# Altium PCB bh_carrier_0_beta.PcbDoc (part 1 of 2)
Units mm, origin at the board's own origin, x right, y up, seen from the top; angles counter-clockwise.
Board outline 100 x 60 mm, 2 copper layers (Top Layer, Bottom Layer); 128 components, 129 nets, 524 pads, 190 vias.
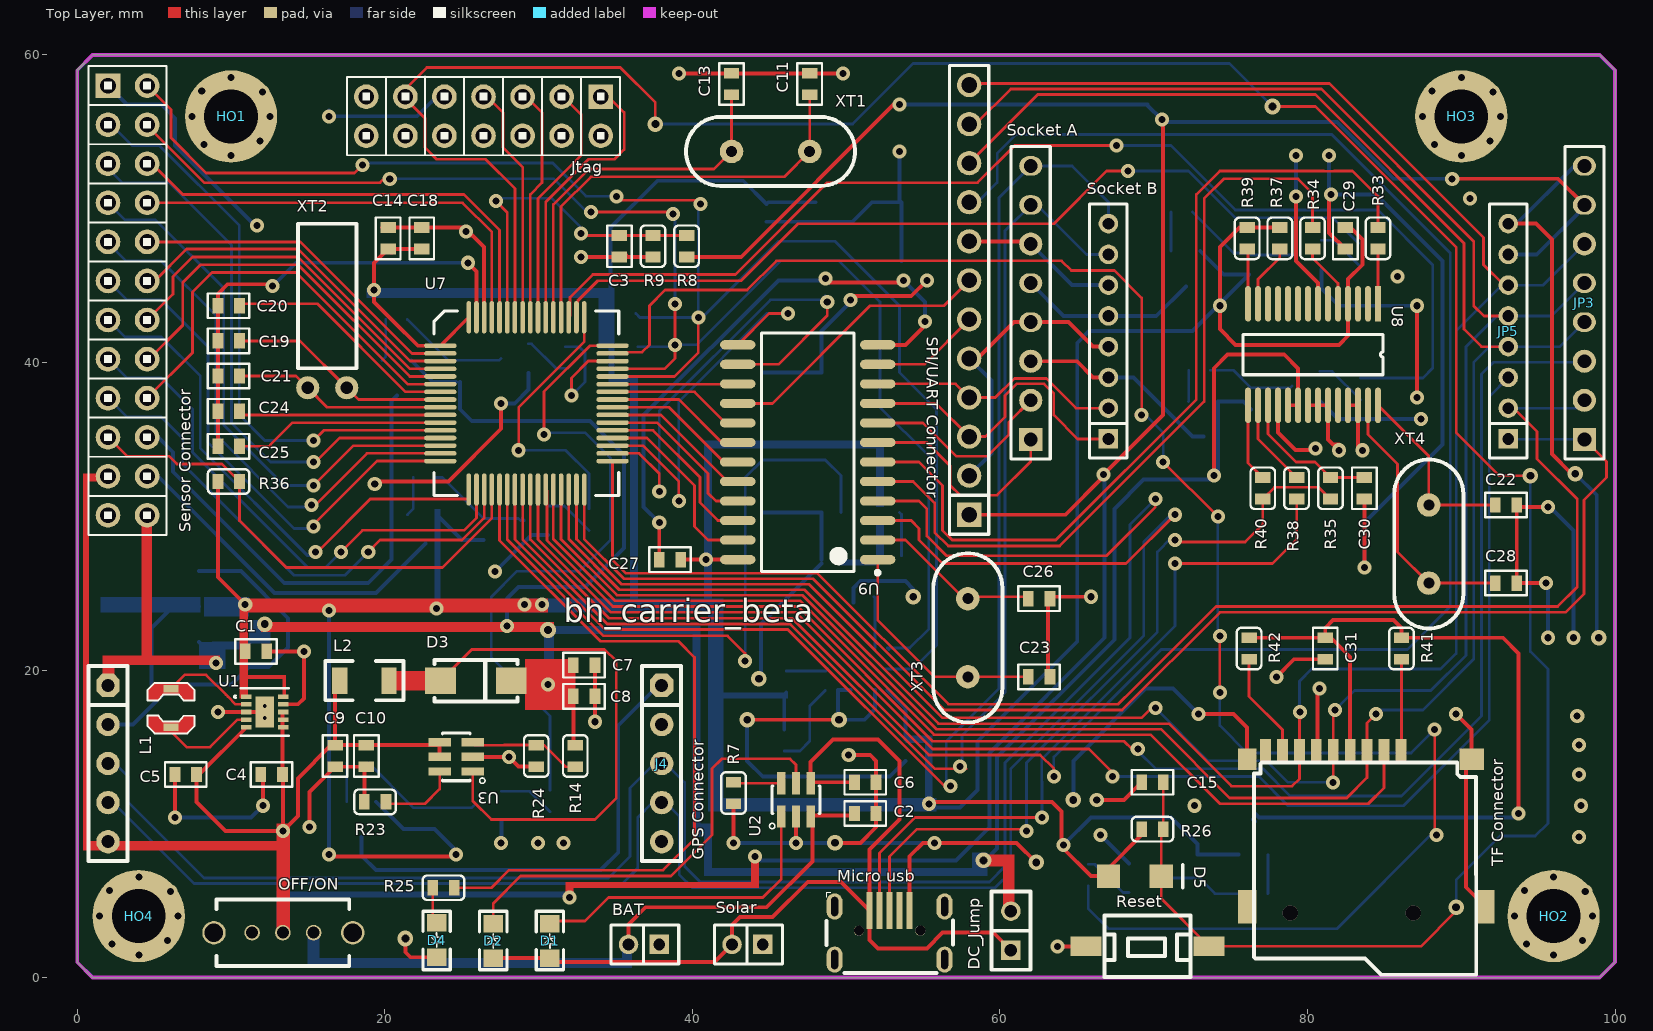
[diagram p0: Top Layer view]
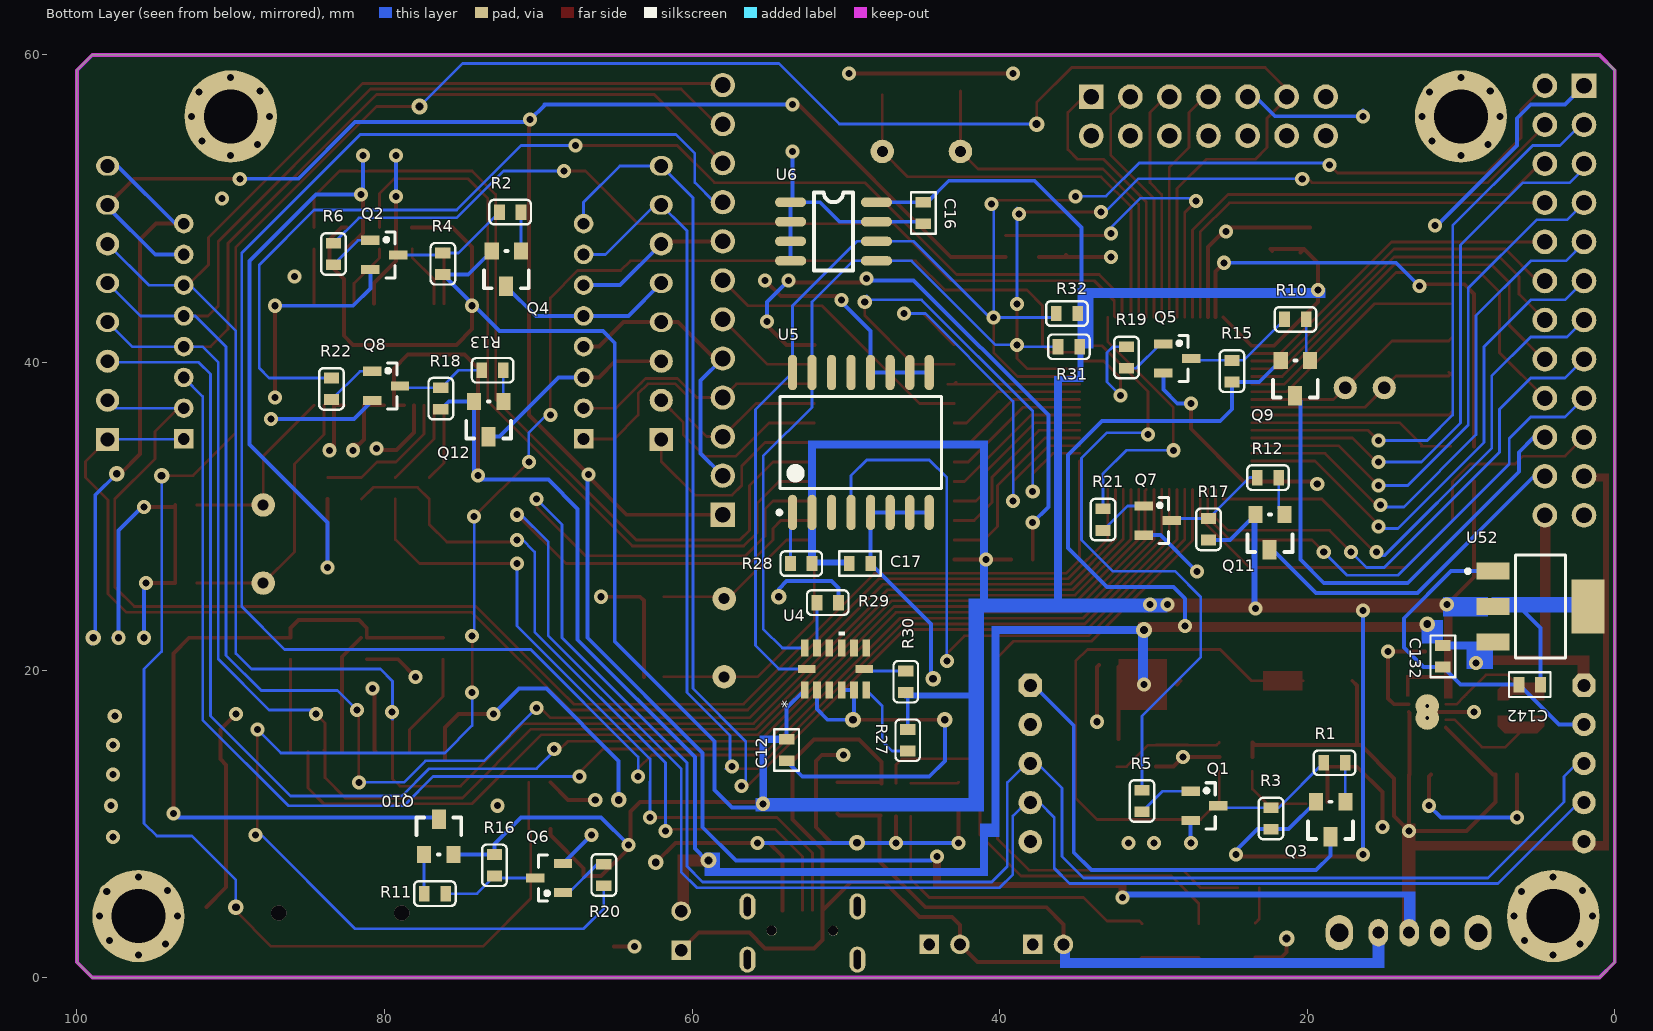
[diagram p1: Bottom Layer view, seen from below]

## Layer stack, top to bottom
Top Layer: signal copper 0.0356
Dielectric: dielectric 0.32, FR-4, Dk 4.8
Bottom Layer: signal copper 0.0356

## Board outline
0,59 1,60 99,60 100,59 100,1 99,0 1,0 0,1

## Design rules (kind name [scope] priority, off if disabled: settings)
Clearance Clearance_1 [(InPolygon)] p1: gap=0.508
Clearance [All] p2: gap=0.178
HoleSize [All] p1: absolutevalues=TRUE maxlimit=25.4 minlimit=0.025 maxpercent=80.000 minpercent=20.000
MinimumSolderMaskSliver [All] p1 off: minsoldermaskwidth=0.254
PolygonConnect [All] p1: connectstyle=Relief reliefconductorwidth=0.254 reliefentries=4 polygonreliefangle="90 Angle"
RoutingVias [All] p1: holewidth=0.508 width=1.016 viastyle="Through Hole" minholewidth=0.381 minwidth=0.762 maxholewidth=0.508 maxwidth=1.016
ShortCircuit ShortCircuit_1 [HasFootPrint('HOLE1') OR  HasFootPrint('QFN-10') OR HasFootPrint('LPS3010')] p1: allowed=TRUE
ShortCircuit [All] p2: allowed=FALSE
SilkToSilkClearance [All] p1: silktosilkclearance=0.178
SilkscreenOverComponentPads [All] p1 off: minsilkscreentomaskgap=0.254
SolderMaskExpansion [All] p1: expansion=0.102
Width Width_2 [(OnLayer('Keep-Out Layer'))] p1: maxlimit=0.254 minlimit=0.254 preferedwidth=0.254
Width Width_1 [(InNet('VBUS') OR InNet('VCC_BASE_3.3V') OR InNet('VCC_BASE_5V') OR InNet('VCC_GPS_3.3V') OR InNet('VCC_SD_3.3V') OR InNet('VCC_SENSOR_3.3V') OR InNet('VCC_SENSOR_5V') OR InNet('VCC_SOCKET_3.3V') OR InNet('VCC_SOCKET_5V') OR InNet('VIN') OR InNet('V_BAT') OR InNet('GND') OR InNet('BAT'))] p2: maxlimit=0.254 minlimit=0.254 preferedwidth=0.254
Width [All] p3: maxlimit=0.178 minlimit=0.178 preferedwidth=0.178 minimp=50.000000 maximp=50.000000 favimp=50.000000
23 further rules are at their usual default settings.

## Components (designator, comment, footprint, x,y, rotation, side; value= is the part's Value field where it differs from the comment)
BAT "Battery Connector" SIP1X2X2.0 37.846,2.159 r180 top (schematic designator J1)
C1 "10uf/6.3V" C0603 10.922,21.209 r0 top
C2 "10uF" C0603 51.943,10.668 r180 top
C3 "0.1uf" C0603 35.253,48.26 r270 top
C4 "0.1uf" C0603 11.938,13.208 r0 top
C5 "4.7uf/6.3V" C0603 6.35,13.208 r0 top
C6 "1uF" C0603 51.943,12.7 r180 top
C7 "22uF/16V" C0603 32.258,20.32 r0 top
C8 "0.1uF" C0603 32.258,18.288 r0 top
C9 "0.1uF" C0603 16.764,15.113 r270 top
C10 "10uF/6.3V" C0603 18.796,15.113 r270 top
C11 "22pf" C0603 47.625,58.801 r270 top
C12 "0.1uF" C0603 53.848,15.494 r270 bottom
C13 "22pf" C0603 42.545,58.801 r270 top
C14 "0.1uf" C0603 20.214,47.371 r90 top
C15 "0.1uf" C0603 70.612,12.7 r180 top
C16 "0.1uF" C0603 44.958,50.419 r270 bottom
C17 "0.1uF" C0603 49.784,26.924 r180 bottom
C18 "0.1uf" C0603 22.4,47.371 r90 top
C19 "22pf" C0603 9.144,41.402 r0 top
C20 "0.1uf" C0603 9.144,43.688 r0 top
C21 "22pf" C0603 9.144,39.116 r0 top
C22 "22pf" C0603 92.202,30.734 r0 top
C23 "22pf" C0603 61.846,19.558 r0 top
C24 "0.1uf" C0603 10.544,36.83 r180 top
C25 "0.1uf" C0603 10.544,34.544 r180 top
C26 "22pf" C0603 63.246,24.638 r180 top
C27 "0.1uF" C0603 37.846,27.178 r0 top
C28 "22pf" C0603 92.202,25.654 r0 top
C29 "0.1uf" C0603 82.455,48.771 r270 top
C30 "0.1u" C0603 83.693,31.115 r90 top
C31 "0.1uf" C0603 81.153,20.698 r90 top
C132 "" C0603 11.176,21.59 r270 bottom
C142 "" C0603 4.826,19.05 r0 bottom
D1 "LED-RED" D0805 30.734,1.27 r90 top
D2 "LED-GREEN" D0805 27.051,1.27 r90 top
D3 "SM340A" DO-214 23.622,19.304 r0 top
D4 "LED-GREEN" D0805 23.368,3.556 r270 top
D5 "IN4148" D1206 67.056,6.604 r0 top
DC_Jump "JUMPER0" SIP1X2X2.54 60.706,1.778 r90 top (schematic designator JP16)
"GPS Connector" "GPS_Socket-B" SIP1X5X2.54 2,19 r270 top locked (schematic designator J5)
HO1 "HOL" HOLE1 10,56 r0 top locked
HO2 "HOL" HOLE1 96,4 r0 top locked
HO3 "HOL" HOLE1 90,56 r0 top locked
HO4 "HOL" HOLE1 4,4 r0 top locked
J4 "GPS_Socket-A" SIP1X5X2.54 38,19 r270 top locked
JP3 "Socket0-B" SIP1x8x2.54 98,35 r90 top locked
JP5 "Socket1B" SIP1x8x2.0 93,35 r90 top locked
Jtag "JTAG" SIP2X7X2.54 34.036,57.285 r180 top (schematic designator P2)
L1 "1.5uH" LPS3010 6.096,17.526 r270 top
L2 "3.3uH" L1206 18.669,19.304 r0 top
"Micro usb" "USB" MicroUSB_four 50.546,4.572 r0 top (schematic designator P1)
OFF/ON "SD12D07VG3" SW-1-2 15.367,2.921 r270 top (schematic designator S1)
Q1 "9013" SOT-23 26.676,11.17 r180 bottom
Q2 "9013" SOT-23 80.01,46.99 r180 bottom
Q3 "RTR020P02" TSMT3 17.526,11.43 r0 bottom
Q4 "RTR020P02" TSMT3 71.126,47.238 r0 bottom
Q5 "9013" SOT-23 28.448,40.259 r180 bottom
Q6 "9013" SOT-23 69.291,6.477 r0 bottom
Q7 "9013" SOT-23 29.718,29.718 r180 bottom
Q8 "9013" SOT-23 79.889,38.475 r180 bottom
Q9 "RTR020P02" TSMT3 19.818,40.126 r0 bottom
Q10 "RTR020P02" TSMT3 77.419,8.001 r180 bottom
Q11 "RTR020P02" TSMT3 21.474,30.099 r0 bottom
Q12 "RTR020P02" TSMT3 72.269,37.459 r0 bottom
R1 "10k" R0603 17.526,13.97 r0 bottom
R2 "10k" R0603 71.126,49.778 r0 bottom
R3 "100k" R0603 22.352,9.652 r90 bottom
R4 "100k" R0603 76.2,45.72 r90 bottom
R5 "1k" R0603 30.74,12.186 r270 bottom
R6 "1k" R0603 83.312,47.752 r270 bottom
R7 "1.66k 1%" R0603 42.672,11.303 r90 top
R8 "1M  1%" R0603 39.624,48.26 r270 top
R9 "1M 1%" R0603 37.439,48.26 r270 top
R10 "10k" R0603 20.066,42.799 r0 bottom
R11 "10k" R0603 77.419,5.461 r180 bottom
R12 "10k" R0603 21.844,32.512 r0 bottom
R13 "10k" R0603 72.269,39.491 r0 bottom
R14 "110k" R0603 32.385,13.716 r90 top
R15 "100k" R0603 24.892,38.735 r90 bottom
R16 "100k" R0603 72.847,8.001 r270 bottom
R17 "100k" R0603 26.416,28.448 r90 bottom
R18 "100k" R0603 76.333,36.951 r90 bottom
R19 "1k" R0603 31.75,41.021 r270 bottom
R20 "1k" R0603 65.735,5.969 r90 bottom
R21 "1k" R0603 33.274,30.48 r270 bottom
R22 "1k" R0603 83.445,38.983 r270 bottom
R23 "18k" R0603 18.669,11.43 r0 top
R24 "15k" R0603 29.845,13.716 r90 top
R25 "1k" R0603 23.114,5.842 r0 top
R26 "4.7k" R0603 70.612,9.652 r180 top
R27 "0" R0603 45.974,16.129 r270 bottom
R28 "10k" R0603 53.594,26.924 r180 bottom
R29 "0" R0603 51.873,24.384 r180 bottom
R30 "10k" R0603 46.101,18.542 r90 bottom
R31 "10k" R0603 36.195,41.021 r180 bottom
R32 "10k" R0603 36.322,43.18 r180 bottom
R33 "100" R0603 84.582,47.371 r90 top
R34 "100" R0603 80.328,47.371 r90 top
R35 "2k" R0603 81.492,31.115 r90 top
R36 "4.7K" R0603 9.144,32.258 r0 top
R37 "10k" R0603 78.2,47.371 r90 top
R38 "51" R0603 79.29,31.115 r90 top
R39 "10k" R0603 76.073,47.371 r90 top
R40 "51" R0603 77.089,31.115 r90 top
R41 "10k" R0603 86.106,22.098 r270 top
R42 "10k" R0603 76.2,22.098 r270 top
Reset "KEY" KEY_2Pin 69.596,2.032 r0 top (schematic designator K1)
"Sensor Connector" "Sensor Connector" SIP2X12X2.54 2,58 r270 top locked (schematic designator JP1)
"Socket A" "Socket0-A" SIP1x8x2.54 62,35 r90 top locked (schematic designator JP2)
"Socket B" "Socket1-A" SIP1x8x2.0 67,35 r90 top locked (schematic designator JP4)
Solar "Solar Connetcor" SIP1X2X2.0 44.577,2.159 r180 top (schematic designator J2)
"SPI/UART Connector" "SPI/UART Connector" SIP1x12x2.54 58,30.098 r90 top locked (schematic designator JP6)
"TF Connector" "microSD" TF_CARD 83.82,9.652 r270 top (schematic designator SD1)
U1 "TPS63031" QFN-10 12.192,17.272 r0 top
U2 "TP4057" SOT23-6 46.736,11.557 r180 top
U3 "FP6291" SOT23-6 24.638,14.351 r270 top
U4 "ADXL345" LGA-CC-14-1 50.673,20.066 r90 bottom
U5 "DS3231S" SOP16 49.022,34.798 r90 bottom
U6 "AT24C16" SO-8 53.594,50.419 r180 bottom
U7 "MSP430F149" LQFP64_M 29.21,37.338 r0 top
U8 "PL2303" SOP28 85.852,59.69 r270 top
U9 "GM8125-SSO" SOP-24 47.498,34.163 r180 top
U52 "LM1117-3.3V" SOT-223 4.826,24.13 r270 bottom
XT1 "8M" HC-49S 47.625,53.721 r180 top
XT2 "32.768K" AT308 14.986,38.354 r270 top
XT3 "12M" HC-49S 57.912,24.638 r270 top
XT4 "12MHz" HC-49S 87.884,25.654 r90 top

## Footprints (in the part's own frame and the unit in brackets; to place one, negate y for a bottom-side part, rotate by r counter-clockwise, add the part's x,y. Pads: shape width x height; smd on the part's side, far side on the other; paste and mask are expansions set on the pad)
AT308 [mm] "XT32748"
  round 1.5 hole 0.8: 1(0,0) 2(0,2.54)
  silkscreen extent -10.67,-0.64 -1.27,3.17, body extent -10.19,-0.55 0.59,2.9, height 3.12
C0603 [mm]
  rect 0.7x1 smd: 1(0,0) 2(1.4,0)
  silkscreen extent -0.65,-0.8 2.05,0.8, body extent -0.09,-0.38 1.51,0.42, height 0.3
D0805 [mil]
  rect 45x50 smd: A(0,0) K(88,0)
  silkscreen extent -30,-35 120,35, body extent 7,-20 88,16, height 33
D1206 [mil]
  rect 60x60 smd: 1(135,0) 2(0,0)
  silkscreen extent 190,-30 190,30
DO-214 [mm]
  rect 2x1.75 smd: 1(0,0) 2(4.6,0)
  silkscreen extent -0.4,-1.35 5,1.35, body extent -0.2,-1.34 4.91,1.33, height 2.12
HC-49S [mil]
  round 60 hole 28: 1(0,0) 2(200,0)
  silkscreen extent -116,-88 316,89, body extent -123,-92 329,92, height 138
HOLE1 [mm]
  round 6 hole 3.5: 0(0,0)
KEY_2Pin [mm]
  rect 2.032x1.27 smd: 1(-4,0) 2(4,0)
  silkscreen extent -2.8,-2 2.8,2
L1206 [mm] "Chip Resistor, 2-Leads, Body 3.2x1.6mm, IPC Medium Density"
  rect 1x1.75 smd: 1(-1.6,0) 2(1.6,0)
  silkscreen extent -2.54,-1.27 2.54,1.27, body extent -1.65,-0.8 1.65,0.8, height 0.6
LGA-CC-14-1 [mm]
  rect 1.118x0.5 smd mask+0.025: 1(-1.371,2) 2(-1.371,1.2) 3(-1.371,0.4) 4(-1.371,-0.4) 5(-1.371,-1.2) 6(-1.371,-2) 8(1.371,-2) 9(1.371,-1.2) 10(1.371,-0.4) 11(1.371,0.4) 12(1.371,1.2) 13(1.371,2)
  rect 0.5x1.118 smd mask+0.025: 7(0,-1.871) 14(0,1.871)
  silkscreen extent 2.18,-0.59 2.44,-0.21
LPS3010 [mm]
  rect 0.5x1 smd mask+0: 1(-1.255,0.002) 2(1.255,-0.002)
  Top Layer region: -1.179,1.526 -0.493,1.526 -0.493,0.84 -0.874,0.535 -0.874,-0.531 -0.493,-0.836 -0.493,-1.522 -1.179,-1.522 -1.636,-1.065 -1.636,1.069
  Top Layer region: 1.179,-1.526 0.493,-1.526 0.493,-0.84 0.874,-0.535 0.874,0.531 0.493,0.836 0.493,1.522 1.179,1.522 1.636,1.065 1.636,-1.069
  silkscreen extent -1.64,-1.53 1.64,1.53, body extent -1.59,-1.61 1.56,1.55, height 1
LQFP64_M [mm] "作者：王千会"
  oval 2.1x0.3 smd: 1(-5.6,3.75) 2(-5.6,3.25) 3(-5.6,2.75) 4(-5.6,2.25) 5(-5.6,1.75) 6(-5.6,1.25) 7(-5.6,0.75) 8(-5.6,0.25) 9(-5.6,-0.25) 10(-5.6,-0.75) 11(-5.6,-1.25) 12(-5.6,-1.75) 13(-5.6,-2.25) 14(-5.6,-2.75) 15(-5.6,-3.25) 16(-5.6,-3.75) 33(5.6,-3.75) 34(5.6,-3.25) 35(5.6,-2.75) 36(5.6,-2.25) 37(5.6,-1.75) 38(5.6,-1.25) 39(5.6,-0.75) 40(5.6,-0.25) 41(5.6,0.25) 42(5.6,0.75) 43(5.6,1.25) 44(5.6,1.75) 45(5.6,2.25) 46(5.6,2.75) 47(5.6,3.25) 48(5.6,3.75)
  oval 0.3x2.1 smd: 17(-3.75,-5.6) 18(-3.25,-5.6) 19(-2.75,-5.6) 20(-2.25,-5.6) 21(-1.75,-5.6) 22(-1.25,-5.6) 23(-0.75,-5.6) 24(-0.25,-5.6) 25(0.25,-5.6) 26(0.75,-5.6) 27(1.25,-5.6) 28(1.75,-5.6) 29(2.25,-5.6) 30(2.75,-5.6) 31(3.25,-5.6) 32(3.75,-5.6) 49(3.75,5.6) 50(3.25,5.6) 51(2.75,5.6) 52(2.25,5.6) 53(1.75,5.6) 54(1.25,5.6) 55(0.75,5.6) 56(0.25,5.6) 57(-0.25,5.6) 58(-0.75,5.6) 59(-1.25,5.6) 60(-1.75,5.6) 61(-2.25,5.6) 62(-2.75,5.6) 63(-3.25,5.6) 64(-3.75,5.6)
  silkscreen extent -6,-6 6,6, body extent -6.07,-6.07 6.07,6.07, height 1.63
MicroUSB_four [mm]
  rect 0.4x2.4 smd: 1(0.976,-0.2) 2(1.626,-0.2) 3(2.276,-0.2) 4(3.576,-0.2) NC(2.926,-0.2)
  oval 1.05x1.7 hole 0.45 slot 1.25 at 90 deg: ""(-1.299,-3.4) ""(-1.299,0.05) ""(5.851,-3.4) ""(5.851,0.05)
  round 0.65 hole 0.65: ""(0.276,-1.525) ""(4.276,-1.525)
  silkscreen extent -1.82,-4.28 6.4,0.99, body extent -1.82,-4.94 6.38,0.99, height 2.69
QFN-10 [mm] "DSK10_2X1P2T"
  rect 0.704x0.3 smd paste-0.15: 1(-1.202,1) 2(-1.202,0.5) 3(-1.202,0) 4(-1.202,-0.5) 5(-1.202,-1) 6(1.202,-1) 7(1.202,-0.5) 8(1.202,0) 9(1.202,0.5) 10(1.202,1)
  rect 1.2x2 smd paste-0.987 mask-0.987: 11(0,0)
  round 0.508 / inner round 1.524 / far side round 1.524 hole 0.254: V(0,-0.394) V_2(0,0.394)
  Top Layer region: 0,1 0,1 0,1 0,1 0,1 0,1 0,1 0,1
  Top Layer region: 0,-1 0,-1 0,-1 0,-1 0,-1 0,-1 0,-1 0,-1
  silkscreen extent -1.98,-1.55 1.55,1.55
R0603 [mm]
  rect 0.7x1 smd: 1(0,0) 2(1.4,0)
  silkscreen extent -0.65,-0.8 2.05,0.8, body extent -0.1,-0.4 1.5,0.4, height 0.3
SIP1X2X2.0 [mil]
  rect 50x50 hole 30: 1(0,0)
  round 50 hole 30: 2(78.74,0)
  silkscreen extent -50,-50 124,50
SIP1X2X2.54 [mil]
  rect 50x50 hole 32: 1(0,0)
  round 50 hole 32: 2(100,0)
  silkscreen extent -50,-50 150,50, body extent -52,-52 148,48, height 340
SIP1X5X2.54 [mil]
  oct 60x60 hole 33: 1(0,0)
  round 60 hole 33: 2(100,0) 3(200,0) 4(300,0) 5(400,0)
  silkscreen extent -50,-50 450,50
SIP1x8x2.0 [mil]
  rect 50x50 hole 30: 1(1,-2)
  round 50 hole 30: 2(79.74,-2) 3(158.48,-2) 4(237.22,-2) 5(315.96,-2) 6(394.7,-2) 7(473.44,-2) 8(552.18,-2)
  silkscreen extent -48,-50 602,46
SIP1x8x2.54 [mm] "Connector; Header; 8 Position"
  rect 1.5x1.5 hole 0.9: 1(0,0)
  round 1.5 hole 0.9: 2(2.54,0) 3(5.08,0) 6(12.7,0)
  oval 1.27x1.5 hole 0.9: 4(7.62,0) 5(10.16,0) 7(15.24,0) 8(17.78,0)
  silkscreen extent -1.27,-1.27 19.05,1.27, body extent -1.27,-1.27 19.05,1.27, height 0.7
SIP1x12x2.54 [mil]
  rect 62x62 hole 40: 1(0,0)
  round 62 hole 40: 2(100,0) 3(200,0) 4(300,0) 5(400,0) 6(500,0) 7(600,0) 8(700,0) 9(800,0) 10(900,0) 11(1000,0) 12(1100,0)
  silkscreen extent -50,-50 1150,50
SIP2X7X2.54 [mil]
  rect 63x63 hole 40: 1(0,0)
  round 63 hole 40: 2(0,100) 3(100,0) 4(100,100) 5(200,0) 6(200,100) 7(300,0) 8(300,100) 9(400,0) 10(400,100) 11(500,0) 12(500,100) 13(600,0) 14(600,100)
  silkscreen extent -50,-51 650,150, body extent -51,-52 648,150, height 340
SIP2X12X2.54 [mil]
  rect 63x63 hole 40: 1(0,0)
  round 63 hole 40: 2(0,100) 3(100,0) 4(100,100) 5(200,0) 6(200,100) 7(300,0) 8(300,100) 9(400,0) 10(400,100) 11(500,0) 12(500,100) 13(600,0) 14(600,100) 15(700,0) 16(700,100) 17(800,0) 18(800,100) 19(900,0) 20(900,100) 21(1000,0) 22(1000,100) 23(1100,0) 24(1100,100)
  silkscreen extent -50,-50 1150,150, body extent -51,-52 1148,150, height 340
SO-8 [mil]
  oval 80x24 smd: 1(0,0) 2(0,-50) 3(0,-100) 4(0,-150) 5(220,-150) 6(220,-100) 7(220,-50) 8(220,0)
  silkscreen extent 60,-175 160,25, body extent -9,-171 229,21, height 67
SOP16 [mm] "SOP, 16-Leads, Body 10.5x7.5mm (max), Pitch 1.27mm, IPC Medium Density"
  oval 2.3x0.6 smd: 1(-4.55,4.445) 2(-4.55,3.175) 3(-4.55,1.905) 4(-4.55,0.635) 5(-4.55,-0.635) 6(-4.55,-1.905) 7(-4.55,-3.175) 8(-4.55,-4.445) 9(4.55,-4.445) 10(4.55,-3.175) 11(4.55,-1.905) 12(4.55,-0.635) 13(4.55,0.635) 14(4.55,1.905) 15(4.55,3.175) 16(4.55,4.445)
  silkscreen extent -4.67,-5.25 3,5.42, body extent -3.75,-5.25 3.75,5.25, height 2.65
SOP28 [mm] "PL2303"
  rect 2.3x0.38 smd: 1(15.875,-1.27)
  oval 2.3x0.38 smd: 2(15.875,-1.92) 3(15.875,-2.57) 4(15.875,-3.22) 5(15.875,-3.87) 6(15.875,-4.52) 7(15.875,-5.17) 8(15.875,-5.82) 9(15.875,-6.47) 10(15.875,-7.12) 11(15.875,-7.77) 12(15.875,-8.42) 13(15.875,-9.07) 14(15.875,-9.72) 15(22.475,-9.72) 16(22.475,-9.07) 17(22.475,-8.42) 18(22.475,-7.77) 19(22.475,-7.12) 20(22.475,-6.47) 21(22.475,-5.82) 22(22.475,-5.17) 23(22.475,-4.52) 24(22.475,-3.87) 25(22.475,-3.22) 26(22.475,-2.57) 27(22.475,-1.92) 28(22.475,-1.27)
  silkscreen extent 17.86,-10.05 20.49,-0.95, body extent 17.86,-10.05 20.49,-0.94, height 0.08
SOP-24 [mm] "SOP, 24-Leads, Body 15.5x7.6mm (max), Pitch 1.27mm, IPC Medium Density"
  oval 2.3x0.6 smd: 1(-4.55,6.985) 2(-4.55,5.715) 3(-4.55,4.445) 4(-4.55,3.175) 5(-4.55,1.905) 6(-4.55,0.635) 7(-4.55,-0.635) 8(-4.55,-1.905) 9(-4.55,-3.175) 10(-4.55,-4.445) 11(-4.55,-5.715) 12(-4.55,-6.985) 13(4.55,-6.985) 14(4.55,-5.715) 15(4.55,-4.445) 16(4.55,-3.175) 17(4.55,-1.905) 18(4.55,-0.635) 19(4.55,0.635) 20(4.55,1.905) 21(4.55,3.175) 22(4.55,4.445) 23(4.55,5.715) 24(4.55,6.985)
  silkscreen extent -4.68,-7.75 3,7.96, body extent -3.8,-7.75 3.8,7.75, height 2.65
SOT23-6 [mm] "SOT-23/SC-74A; 5 Leads; Body 3.1 x 3 mm, inc. leads (LxW max)"
  rect 0.55x1.45 smd: 1(0.95,1.075) 2(0,1.075) 3(-0.95,1.075) 4(-0.95,-1.075) 5(0,-1.075) 6(0.95,-1.075)
  silkscreen extent -1.55,-0.9 1.72,1.88, body extent -1.4,-1.19 1.4,1.23, height 1.08
SOT-23 [mm] "SOT23, 3-Leads, Body 2.9x1.3mm, Pitch 0.95mm, Lead Span 2.5mm, IPC High Density"
  rect 1.2x0.6 smd: 1(-0.9,0.95) 2(-0.9,-0.95) 3(0.9,0)
  silkscreen extent 0,-1.5 0.7,1.5, body extent -0.7,-1.5 0.7,1.5, height 1.1
SOT-223 [mm] "SOT-223/SC-73; 4 Leads; Body 6.7 x 7.3 mm, inc. leads (LxW max)"
  rect 1.1x2.15 smd: 1(-2.3,-3.1) 2(0,-3.1) 3(2.3,-3.1)
  rect 3.5x2.15 smd: 4(0,3.1)
  silkscreen extent -3.35,-4.85 3.35,1.63, body extent -3.25,-3.58 3.25,3.38, height 1.65
SW-1-2 [mil]
  round 60 / inner round 60 / far side oval 90x70 hole 47.24: 0(0,100) 0(0,-255)
  round 40 / inner round 40 / far side oval 70x50 hole 30.62: 1(0,0) 2(0,-78.74) 3(0,-157.48)
  silkscreen extent -85,-249 85,91
TF_CARD [mm]
  rect 2.2x1.2 smd: 0(5.05,-7.75) 11(5.05,7.75)
  rect 1.6x0.7 smd: 1(-5.05,2.25) 2(-5.05,1.15) 3(-5.05,0.05) 4(-5.05,-1.05) 5(-5.05,-2.15) 6(-5.05,-3.25) 7(-5.05,-4.35) 8(-5.05,-5.45) 9(-5.05,-6.55)
  rect 1.4x1.2 smd: 10(-4.55,-7.75)
  rect 1.4x1.6 smd: 12(-4.55,6.85)
  silkscreen extent -4.35,-7.29 9.47,7.15
TSMT3 [mil]
  rect 36x44 smd: 1(-0.24,-0.24) 2(74.76,-0.24)
  rect 36x50 smd: 3(38,90)
  silkscreen extent -20,0 95,95, body extent -24,15 99,69, height 43

## Part data
BAT Solar: library part SIP1X2, "Connector"
C1 C2 C3 C4 C5 C6 C7 C8 C9 C10 C11 C12 C13 C14 C15 C16 C17 C18 C19 C20 C21 C22 C23 C24 C25 C26 C27 C28 C29 C30 C31 C132 C142: library part CAP-SMD, "SMD-CAP"
D1 D2 D4: library part LED
D3: library part "DIODE SCHOTTKY", "Schottky Diode"
D5: library part DIODE
"GPS Connector" J4: library part SIP1X5, "Connector"
HO1 HO2 HO3 HO4: library part Antenna, "Generic Antenna"
JP3 JP5 "Socket A" "Socket B": library part SIP1X8, "8 Pin Header"
Jtag: library part "Header 7X2", "Header, 7-Pin, Dual row"
L1: library part L1, "LPS3015-152"
L2: library part INDUCTOR, "Inductor"
OFF/ON: library part SW-SPDT
Q1 Q2 Q5 Q6 Q7 Q8: library part NPN, "NPN Transistor"
Q3 Q4 Q9 Q10 Q11 Q12: library part "MOSFET P"
R1 R2 R3 R4 R5 R6 R7 R8 R9 R10 R11 R12 R13 R14 R15 R16 R17 R18 R19 R20 R21 R22 R23 R24 R25 R26 R27 R28 R29 R30 R31 R32 R33 R34 R35 R36 R37 R38 R39 R40 R41 R42: library part RES, "Resistor"
"Sensor Connector": library part SIP2X12
"SPI/UART Connector": library part SIP1X12, "12 Pin Header"
U1: library part TPS63031_2
U2: library part PT4057
U5: library part DS3231
U9: library part GM8125
U52: library part ASM1117-2.5V, "ASM1117-2.5V"
XT1 XT2 XT3 XT4: library part XT, "晶振"

## Via types
v1: diameter 0.914, hole 0.457, Top Layer to Bottom Layer, 171 vias
v2: diameter 1.016, hole 0.508, Top Layer to Bottom Layer, 17 vias
v3: diameter 1, hole 1, Top Layer to Bottom Layer, 2 vias

## Nets (pads, with @x,y where several pads share a name; then routed paths per layer and width w, separated by ;. In a path a pad name is that pad's centre, name@x,y a point inside that pad or via, vN(x,y) a via of type N, cw(c..) or ccw(c..) an arc to the next point about the centre after c; other vN are vias at no path point)
AD0: C3.1 R8.1 R9.1 U7.59 | length 22.6
  Top Layer w0.178: v1(27.223,50.501) 27.96,49.764 U7.59@27.96,42.938 ; v1(32.766,48.387) 32.893,48.26 36.777,48.26 ; C3.1@35.253,48.26 R9.1@37.439,48.26 R8.1@39.624,48.26
  Bottom Layer w0.178: v1@27.305,50.673 30.861,50.673 v1@32.766,48.768
AD1: "Sensor Connector.6" U7.60 | length 30.4
  Top Layer w0.178: 4.54,52.92 4.865,52.92 6.858,50.927 25.146,50.927 27.46,48.613 U7.60@27.46,42.938
AD2: "Sensor Connector.8" U7.61 | length 28.7
  Top Layer w0.178: 4.54,50.38 25.058,50.38 26.96,48.478 U7.61@26.96,42.938
AD3: "Sensor Connector.10" U7.2 | length 22.1
  Top Layer w0.178: 4.54,47.84 14.517,47.84 21.769,40.588 U7.2@23.61,40.588
AD4: "Sensor Connector.12" U7.3 | length 22.9
  Top Layer w0.178: 4.54,45.3 5.041,45.3 7.112,47.371 14.351,47.371 21.634,40.088 U7.3@23.61,40.088
AD5: "Sensor Connector.14" U7.4 | length 24.5
  Top Layer w0.178: 4.54,42.76 6.223,44.443 6.223,45.593 7.493,46.863 14.356,46.863 21.631,39.588 U7.4@23.61,39.588
AD6: "Sensor Connector.16" U7.5 | length 26.9
  Top Layer w0.178: 4.54,40.862 4.54,40.22 4.66,40.22 6.858,42.418 6.858,45.212 8.001,46.355 14.361,46.355 21.628,39.088 U7.5@23.61,39.088
AD7: "Sensor Connector.18" U7.6 | length 27.8
  Top Layer w0.178: 4.54,37.68 7.493,40.633 7.493,44.577 8.763,45.847 14.224,45.847 21.483,38.588 U7.6@23.61,38.588
BAT: BAT.2 C2.2 OFF/ON.1 U2.3 | length 21
  Top Layer w0.254: BAT.2@35.846,2.159 35.846,3.461 36.957,4.572 44.831,4.572 47.818,7.559 47.818,9.398 ; 47.818,9.205 47.818,9.398 ; C2.2@50.543,10.668 50.416,10.541 47.745,10.541 47.818,10.468 47.818,9.398
DATA+: "Micro usb.3" R35.1 R40.1 | length 49.3
  Top Layer w0.178: 52.822,4.372 52.822,7.864 54.61,9.652 v1@61.722,9.652 ; v1(71.374,28.448) 71.501,28.321 75.946,28.321 77.089,29.464 R40.1@77.089,31.115 77.851,31.877 80.73,31.877 R35.1@81.492,31.115
  Bottom Layer w0.178: v1@61.722,9.271 61.722,13.97 70.231,22.479 70.231,27.686 v1@71.12,28.575
  other v1: 61.722,9.525
DATA-: "Micro usb.2" R38.1 | length 47.1
  Top Layer w0.178: 52.172,4.372 52.172,8.103 54.483,10.414 62.484,10.414 62.738,10.16 v1(62.738,10.414) ; v1(71.374,26.924) 77.724,26.924 79.29,28.49 R38.1@79.29,31.115
  Bottom Layer w0.178: 62.725,12.747 62.725,14.211 71.374,22.86 v1(71.374,26.924) ; v1@62.738,10.16 62.738,12.735
EX_RXD1: "GPS Connector.3" J4.3 U9.4 | length 126.3
  Top Layer w0.178: U9.4@52.048,30.988 54.737,30.988 55.245,30.48 55.245,28.702 56.515,27.432 66.929,27.432 70.104,30.607 v1(70.104,31.115)
  Bottom Layer w0.178: 2,14.097 2.286,14.097 3.302,13.081 3.302,11.43 8.255,6.477 14.465,6.477 34.544,6.477 35.941,7.874 35.941,12.319 37.542,13.92 J4.3@38,13.92 ; J4.3@38,14.505 37.692,14.505 39.497,12.7 39.497,7.239 40.513,6.223 59.309,6.223 60.325,7.239 60.325,13.97 68.453,22.098 68.453,29.464 69.85,30.861 70.104,30.861 v1(70.104,31.115)
EX_RXD2: "Socket B.2" "SPI/UART Connector.4" U9.10 | length 16.7
  Top Layer w0.178: U9.10@52.048,38.608 57.11,38.608 58,37.718 59.694,37.718 60.94,38.964 63.012,38.964 63.307,38.669 64.95,37.025 67.051,37.025
EX_RXD3: R33.2 U9.6 | length 56.8
  Top Layer w0.178: U9.6@52.048,33.528 54.737,33.528 56.261,32.004 56.261,29.083 56.896,28.448 63.627,28.448 72.771,37.592 72.771,50.927 74.295,52.451 81.073,52.451 81.086,52.438 81.728,52.438 81.741,52.451 82.931,52.451 84.582,50.8 R33.2@84.582,48.771
EX_RXD4: "Socket A.2" U9.8 | length 12.8
  Top Layer w0.178: U9.8@52.048,36.068 54.991,36.068 57.15,33.909 59.182,33.909 60.579,35.306 60.579,36.119 62,37.54
EX_RXD5: "SPI/UART Connector.7" U9.16 | length 18.4
  Top Layer w0.178: U9.16@42.948,37.338 45.212,37.338 51.562,43.688 56.35,43.688 58,45.338
EX_SPI_CS: "SPI/UART Connector.9" U7.25 | length 135.5
  Top Layer w0.178: U7.25@29.46,31.738 29.46,28.493 34.585,23.368 46.482,23.368 55.372,14.478 62.611,14.478 63.5,13.589 v1(63.5,13.081)
  Bottom Layer w0.178: 58,50.418 58.546,50.418 59.817,51.689 59.817,53.594 61.049,54.826 81.572,54.826 89.281,47.117 89.281,24.13 86.487,21.336 70.485,21.336 63.5,14.351 v1(63.5,13.081)
EX_TXD1: "GPS Connector.4" J4.4 U9.3 | length 120.2
  Top Layer w0.178: U9.3@52.048,29.718 54.229,29.718 54.737,29.21 54.737,28.448 56.261,26.924 68.199,26.924 v1(71.374,30.099)
  Bottom Layer w0.178: 2,11.43 2.286,11.43 7.595,6.121 15.944,6.121 35.458,6.121 36.449,7.112 36.449,10.414 37.415,11.38 J4.4@38,11.38 ; J4.4@38,11.657 J4.4@38.327,11.657 ; J4.4@38.138,11.519 39.141,10.516 39.141,6.706 40.005,5.842 59.69,5.842 60.706,6.858 60.706,13.589 69.342,22.225 69.342,28.321 v1@71.247,30.226
EX_TXD2: "Socket B.1" "SPI/UART Connector.3" U9.9 | length 20.4
  Top Layer w0.178: U9.9@52.048,37.338 55.84,37.338 58,35.178 59.054,35.178 60.325,36.449 60.325,37.846 61.087,38.608 62.865,38.608 63.5,37.973 63.5,36.576 65.051,35.025 67.051,35.025
EX_TXD3: R34.2 U9.5 | length 51.4
  Top Layer w0.178: U9.5@52.048,32.258 54.356,32.258 55.753,30.861 55.753,28.956 56.642,28.067 63.881,28.067 73.279,37.465 73.279,50.673 74.549,51.943 79.375,51.943 80.328,50.99 R34.2@80.328,48.771
EX_TXD4: "Socket A.1" U9.7 | length 14.5
  Top Layer w0.178: U9.7@52.048,34.798 55.245,34.798 56.769,33.274 56.769,32.004 57.404,31.369 59.817,31.369 62,33.552 62,35
EX_TXD5: "SPI/UART Connector.6" U9.11 | length 7.2
  Top Layer w0.178: U9.11@52.048,39.878 55.08,39.878 58,42.798
GM8125_MS: U7.36 U9.23 | length 12.5
  Top Layer w0.178: U7.36@34.81,35.088 37.048,35.088 40.132,32.004 40.132,29.337 41.021,28.448 U9.23@42.948,28.448
GM8125_RST: U7.43 U9.15 | length 8.7
  Top Layer w0.178: U7.43@34.81,38.588 U9.15@43.349,38.588 ; U9.15@42.841,38.715 U9.15@42.948,38.608
GND: "GPS Connector.2" "Micro usb.4" "Sensor Connector.1" "Sensor Connector.23" "Socket A.4" "Socket A.6" "Socket B.4" "Socket B.6" "SPI/UART Connector.2" "SPI/UART Connector.5" "SPI/UART Connector.8" "TF Connector.6" "TF Connector.10" "TF Connector.11" "TF Connector.12" BAT.1 C1.2 C2.1 C3.2 C4.1 C5.1 C6.1 C7.2 C8.2 C9.2 C10.2 C11.1 C12.2 C13.1 C14.2 C15.2 C16.2 C17.2 C18.2 C19.1 C20.1 C21.1 C22.2 C23.2 C24.2 C25.2 C26.1 C27.1 C28.2 C29.2 C30.1 C31.1 C132.2 C142.2 D4.K J4.2 J4.5 JP3.8 JP5.8 Jtag.9 Q1.2 Q2.2 Q5.2 Q6.2 Q7.2 Q8.2 R7.1 R9.2 R23.1 R24.1 R29.2 Reset.1 Solar.1 U1.3 U1.9 U1.11 U2.2 U3.2 U4.2 U4.4 U4.5 U5.5 U5.6 U5.7 U5.8 U5.9 U5.10 U5.11 U5.12 U6.1 U6.2 U6.3 U6.4 U6.7 U7.62 U7.63 U8.7 U8.18 U8.21 U8.22 U8.23 U8.25 U8.26 U9.12 U52.1 | length 558.2
  Top Layer w0.254: v1(6.35,10.414) C5.1@6.35,13.208 ; v1(9.144,17.272) U1.3@10.99,17.272 U1.11@11.795,17.272 ; C25.2@9.144,34.544 C24.2@9.144,36.83 C21.1@9.144,39.116 C19.1@9.144,41.402 C20.1@9.144,43.688 9.144,44.45 9.779,45.085 12.573,45.085 v1(12.7,44.958) ; C4.1@11.938,13.208 12.065,13.081 v1(12.065,11.176) ; C1.2@12.322,21.209 v1(14.732,21.209) 14.732,18.161 14.343,17.772 U1.9@13.394,17.772 ; v1@15.24,9.652 v1(15.113,9.779) 15.113,12.062 C9.2@16.764,13.713 C10.2@18.796,13.713 18.669,13.586 R23.1@18.669,11.43 ; v1(19.344,32.091) 19.304,32.131 19.304,32.258 24.13,32.258 27.559,35.687 v1(27.559,37.338) ; C14.2@19.815,48.771 C14.2@20.214,48.771 C18.2@22.4,48.771 25.016,48.771 25.146,48.641 25.146,48.26 25.698,48.26 26.46,47.498 U7.62@26.46,42.938 ; v2(21.336,2.54) 21.336,1.651 21.666,1.321 D4.K@23.368,1.321 ; Jtag.9@23.876,57.785 Jtag.9@24.003,57.785 ; v1(25.4,46.482) 25.96,45.922 U7.63@25.96,42.938 ; U3.2@25.713,14.351 v1(28.067,14.351) ; v1@28.067,14.224 v1(28.067,14.351) ; R24.1@29.845,13.716 28.702,13.716 v1(28.067,14.351) ; v1(32.766,46.863) R9.2@37.084,46.863 ; C7.2@33.531,20.32 33.658,20.193 C8.2@33.658,18.288 33.658,16.64 v1(33.655,16.637) ; C3.2@35.253,46.86 R9.2@37.439,46.86 ; C3.2@35.56,46.863 C3.2@35.687,46.99 ; C27.1@37.846,27.178 v1(37.846,29.591) ; v1(39.116,58.801) C13.1@42.545,58.801 C11.1@47.625,58.801 v1(49.784,58.801) v1@49.784,58.547 ; v1(42.672,8.763) R7.1@42.672,11.303 R7.1@42.672,11.049 ; v2(43.561,16.764) v2(49.53,16.764) ; v1(46.736,8.763) U2.2@46.736,10.482 ; v1(48.641,45.466) 48.641,45.339 48.768,45.212 v1@53.721,45.212 ; v2(49.276,8.763) 50.927,8.763 51.943,9.779 C2.1@51.943,10.668 C6.1@51.943,12.7 51.943,14.097 51.562,14.478 v1@50.546,14.478 ; v1(50.292,44.069) 50.546,44.323 54.229,44.323 v1(55.245,45.339) ; U9.12@52.048,41.148 53.848,41.148 v1@55.245,42.545 ; 54.122,4.372 54.122,7.894 54.991,8.763 v1@55.499,8.763 ; v1@55.626,8.636 55.753,8.509 v1(55.753,8.763) ; v1@56.007,8.509 v1(55.753,8.763) ; 58,40.258 58.546,40.258 60.908,42.62 62,42.62 64.456,42.62 66.051,41.025 67.051,41.025 ; 58,47.878 61.822,47.878 62,47.7 ; v2(62.357,7.493) 61.087,8.763 v1(55.753,8.763) ; C23.2@63.119,19.558 63.119,24.511 63.373,24.765 v1(65.913,24.765) ; v1(63.754,2.032) Reset.1@65.088,2.032 ; v1@66.167,11.557 68.069,11.557 C15.2@69.212,12.7 ; v1(72.898,17.145) 75.184,17.145 76.07,16.259 76.07,14.202 ; v1(77.978,19.558) 79.118,20.698 C31.1@81.153,20.698 ; U8.18@78.082,37.215 78.082,35.456 79.218,34.32 80.488,34.32 v1@80.518,34.35 ; v1(79.248,50.8) 79.248,46.609 80.682,45.175 U8.7@80.682,43.815 ; U8.21@80.032,37.215 U8.22@80.682,37.215 U8.23@81.332,37.215 81.332,35 81.661,34.671 82.042,34.671 v1(82.042,34.29) ; v1@80.518,34.29 v1@80.518,34.35 ; v1(80.518,34.417) v1@80.518,34.35 ; 80.57,14.702 80.645,14.777 80.645,18.669 v1(80.772,18.796) ; v1(81.534,50.927) 81.407,51.054 81.407,48.419 C29.2@82.455,47.371 ; U8.25@82.632,37.215 U8.26@83.282,37.215 83.282,34.32 83.312,34.29 v1(83.566,34.29) ; v1(83.693,26.67) C30.1@83.693,31.115 ; v1(87.122,37.719) v1@87.122,43.815 ; v1(89.662,17.145) 90.67,16.137 90.67,14.202 90.297,13.829 90.297,5.875 91.57,4.602 ; JP5.8@93.051,49.025 94.866,49.025 95.885,48.006 95.885,34.036 97.155,32.766 v2(97.409,32.766) ; C22.2@93.602,30.734 C28.2@93.602,25.654 v1(95.504,25.654) ; C22.2@93.729,30.607 v1(95.631,30.607)
  Bottom Layer w0.254: 1.778,29.838 2,30.06 ; 1.982,16.46 2,16.46 3.636,16.46 C142.2@6.226,19.05 10.036,19.05 C132.2@11.176,20.19 12.443,20.19 13.716,21.463 13.716,23.368 10.654,26.43 U52.1@7.926,26.43 ; 2,58 3.231,56.769 5.461,56.769 6.35,55.88 6.35,54.102 11.684,48.768 v1(11.684,48.895) ; v1(6.35,10.414) 11.303,10.414 v1(12.065,11.176) ; v1(12.7,44.958) 14.224,46.482 v1(25.4,46.482) ; v1(16.383,56.007) 16.383,56.388 16.764,56.007 22.098,56.007 Jtag.9@23.876,57.785 ; v1(27.178,26.416) 29.53,28.768 Q7.2@30.618,28.768 ; v1(27.559,8.763) 27.576,8.78 Q1.2@27.576,10.22 ; v1(27.559,37.338) 28.448,37.338 29.348,38.238 Q5.2@29.348,39.309 ; v1(37.846,29.591) 36.83,30.607 36.83,36.576 45.593,45.339 48.641,45.339 v1(48.641,45.466) ; v1(42.672,8.763) v1(46.736,8.763) v2(49.276,8.763) v1@55.499,8.763 ; v2(43.561,16.764) 43.561,14.097 44.577,13.081 52.835,13.081 C12.2@53.848,14.094 ; v2(44.323,19.431) 44.45,19.558 44.45,22.99 C17.2@48.384,26.924 ; U5.8@44.577,30.248 U5.7@45.847,30.248 U5.6@47.117,30.248 U5.5@48.387,30.248 C17.2@48.387,27.181 ; U5.9@44.577,39.348 U5.10@45.847,39.348 U5.11@47.117,39.348 U5.12@48.387,39.348 48.387,42.037 50.292,43.942 v1(50.292,44.069) ; C16.2@44.831,49.149 U6.7@48.006,49.149 50.419,49.149 51.689,50.419 U6.1@53.594,50.419 ; U4.5@49.473,18.695 49.473,17.215 49.53,17.158 49.403,17.031 49.403,16.891 v2(49.53,16.764) 51.181,16.764 51.873,17.456 U4.2@51.873,18.695 ; U4.5@49.53,18.695 U4.4@50.273,18.695 ; R29.2@50.473,24.384 50.473,25.327 50.927,25.781 53.848,25.781 54.356,25.273 v2(54.356,24.765) ; v1(53.467,53.721) 53.467,50.546 U6.1@53.594,50.419 ; U6.4@53.594,46.609 U6.3@53.594,47.879 U6.2@53.594,49.149 U6.1@53.594,50.419 ; v1(53.721,45.339) 55.118,43.942 v1(55.118,42.672) ; 58,32.638 59.436,34.074 59.436,38.822 58,40.258 ; 62,47.7 64.675,45.025 67.051,45.025 ; v2(64.77,11.557) 64.77,14.097 69.469,18.796 71.247,18.796 v1(72.898,17.145) ; v1(66.548,9.271) Q6.2@68.391,7.427 ; v1@79.248,50.673 v1(79.248,53.467) ; Q8.2@80.789,37.525 81.992,36.322 v1(87.376,36.322) ; Q2.2@80.91,46.04 80.91,44.82 82.042,43.688 v1(87.122,43.688) ; v1(81.407,53.467) 81.407,51.054 v1(81.534,50.927) 84.455,50.927 88.773,46.609 88.773,34.671 83.693,29.591 v1(83.693,26.67) ; JP5.8@93.051,49.025 93.602,49.025 97.357,52.78 JP3.8@98,52.78 ; v1(95.631,22.098) v1@95.631,25.781 ; v1@95.694,30.67 97.282,29.083 v1(97.282,22.098) v1@97.663,22.098 ; v2(97.409,32.766) 98.806,31.369 98.806,21.971 99.06,21.717 99.187,21.844 v2(98.933,22.098)
  other v1: 29.972,8.763 31.623,8.763 97.663,9.144 72.644,11.176 97.79,11.176 66.294,11.557 97.663,13.208 50.165,14.478 97.663,15.113 97.536,17.018 85.852,45.593 25.273,48.514 90.551,50.673
IO1: "Sensor Connector.3" U7.12 | length 37.6
  Top Layer w0.178: v1(15.367,34.925) 16.03,35.588 U7.12@23.61,35.588
  Bottom Layer w0.178: 2,55.46 2.198,55.46 3.556,54.102 5.334,54.102 10.541,48.895 10.541,36.576 12.192,34.925 v1(15.367,34.925)
IO2: "Sensor Connector.5" U7.13 | length 37.1
  Top Layer w0.178: v1@15.494,33.528 17.054,35.088 U7.13@23.61,35.088
  Bottom Layer w0.178: 2,52.92 2,52.61 2.921,51.689 5.969,51.689 10.033,47.625 10.033,36.068 12.573,33.528 v1(15.367,33.528)
IO3: "Sensor Connector.7" U7.14 | length 35.5
  Top Layer w0.178: v1(15.367,32.004) 17.951,34.588 U7.14@23.61,34.588
  Bottom Layer w0.178: 2,50.38 3.104,49.276 5.08,49.276 9.525,44.831 9.525,35.941 13.462,32.004 v1(15.367,32.004)
IO4: "Sensor Connector.9" U7.15 | length 35.1
  Top Layer w0.178: v1(15.24,30.734) 15.367,30.607 18.848,34.088 U7.15@23.61,34.088
  Bottom Layer w0.178: 2,47.84 2,47.784 3.175,46.609 5.461,46.609 9.017,43.053 9.017,35.306 13.716,30.607 15.367,30.607 v1(15.24,30.734)
IO5: "Sensor Connector.11" U7.16 | length 34.1
  Top Layer w0.178: v1(15.367,29.337) 15.367,29.21 15.367,29.464 19.491,33.588 U7.16@23.61,33.588
  Bottom Layer w0.178: 2,45.3 3.231,44.069 5.461,44.069 8.509,41.021 8.509,34.798 14.097,29.21 15.367,29.21 v1(15.367,29.337)
IO6: "Sensor Connector.13" U7.17 | length 34.9
  Top Layer w0.178: v1(15.494,27.686) 15.494,27.94 15.875,27.94 19.05,31.115 25.46,31.115 U7.17@25.46,31.738
  Bottom Layer w0.178: 2,42.76 3.104,41.656 5.461,41.656 8.001,39.116 8.001,34.417 14.986,27.432 15.24,27.432 v1(15.494,27.686)